# EAGLE board puzzlebot_board (EAGLE 9.5.2)
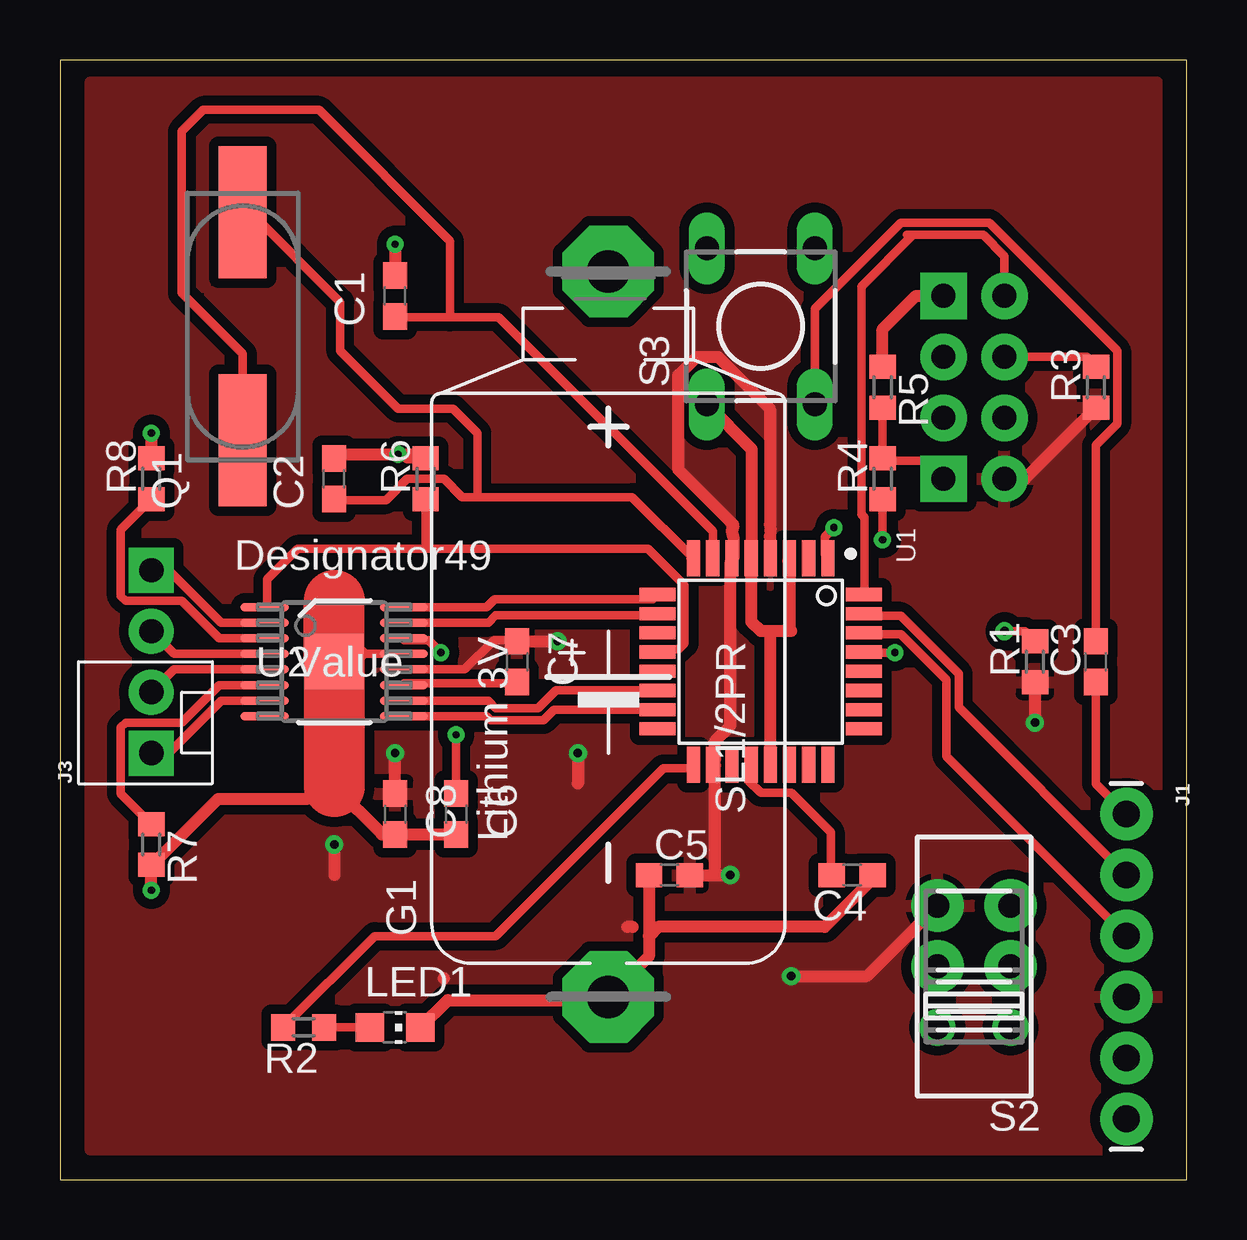
[diagram p0: board, top side]
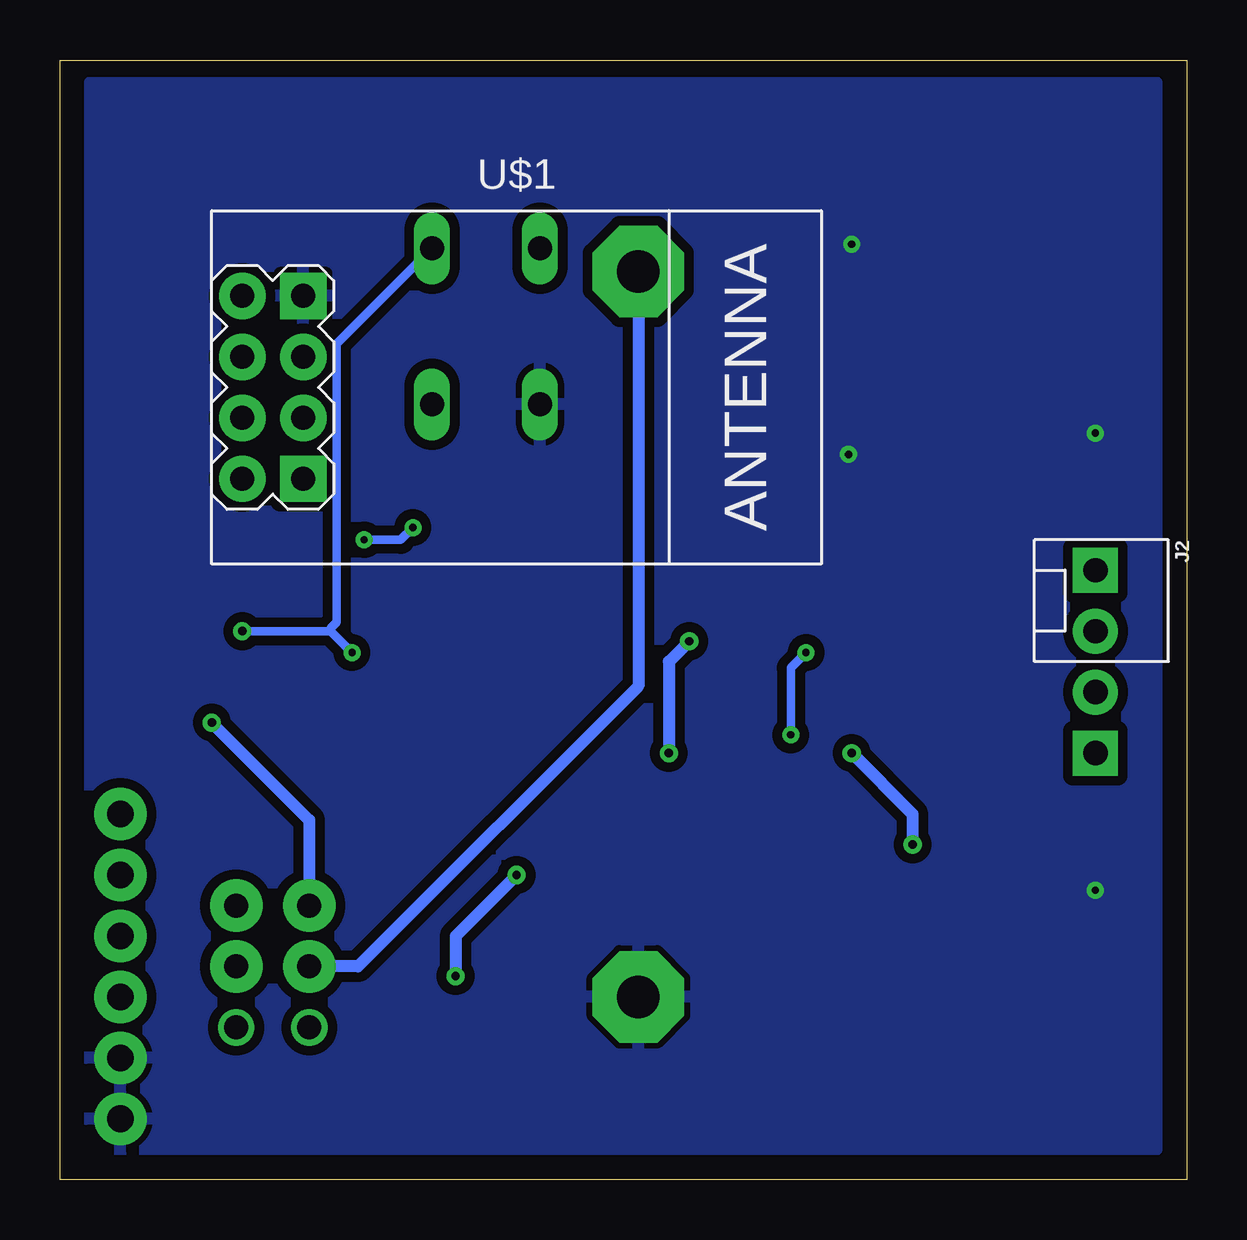
[diagram p1: board, bottom side, seen from below]

Size 46.97 x 46.66 mm. Coordinates in mm from the lower left corner, seen from the top.
Outline: 0,0 46.97,0 46.97,46.66 0,46.66 0,0
Copper layers (1*16): Top 0.035mm / dielectric 1.5mm / Bottom 0.035mm
Design rules "default *": minimum track width 12mil, minimum drill 0.3mm, track to track 6mil, track to pad 6mil, pad to pad 6mil, via to via 6mil, smd to smd 6mil, copper to edge 20mil, drill to drill 6mil, minimum pad ring 10mil, minimum via ring 8mil, stop-mask expansion 4mil, vias tented up to drill 0mil, thermal gap 10mil
Net classes: 0 default: width 0.356 mm; 1 GND: width 0.508 mm, clearance 0.076 mm to class 0

## Footprints (pad centres in the part's own frame; a part is rotated, then mirrored left to right if it is on the bottom)
C0603 = smd 1.1 x 1: 1 -0.85,0; 2 0.85,0
SL-150-1/2AA/PR = drill 1.778 pad 3.81 octagon: + 14.986,0; - -15.24,0
1X06_LONGPADS = drill 1.118 pad 2.184: 1 0,0; 2 2.54,0; 3 5.08,0; 4 7.62,0; 5 10.16,0; 6 12.7,0
MOLEX-1X2 = drill 1.016 pad 1.88 square: 1 0,0 | drill 1.016 pad 1.88: 2 2.54,0
CHIP-LED0805 = smd 1.2 x 1.2: A 0,-1.05; C 0,1.05
CSM-7X-DU = smd 5.5 x 2: 1 -4.75,0; 2 4.75,0
R0603 = smd 1 x 1.1: 1 -0.85,0; 2 0.85,0
2P2T = drill 1 pad 1.422: 1.1 -2.54,1.524; 1.2 -2.54,-1.524 | drill 1 pad 2.184: 2.1 0,1.524; 2.2 0,-1.524; 3.1 2.54,1.524; 3.2 2.54,-1.524
DTS-6 = drill 1 long: 1 -3.25,2.25; 2 3.25,2.25; 3 -3.25,-2.25; 4 3.25,-2.25
QFP80P900X900X120-32N = smd 1.5 x 0.55: 1 -4.3,2.8; 2 -4.3,2; 3 -4.3,1.2; 4 -4.3,0.4; 5 -4.3,-0.4; 6 -4.3,-1.2; 7 -4.3,-2; 8 -4.3,-2.8; 17 4.3,-2.8; 18 4.3,-2; 19 4.3,-1.2; 20 4.3,-0.4; 21 4.3,0.4; 22 4.3,1.2; 23 4.3,2; 24 4.3,2.8 | smd 0.55 x 1.5: 9 -2.8,-4.3; 10 -2,-4.3; 11 -1.2,-4.3; 12 -0.4,-4.3; 13 0.4,-4.3; 14 1.2,-4.3; 15 2,-4.3; 16 2.8,-4.3; 25 2.8,4.3; 26 2,4.3; 27 1.2,4.3; 28 0.4,4.3; 29 -0.4,4.3; 30 -1.2,4.3; 31 -2,4.3; 32 -2.8,4.3
PWP0016K_M = smd 2 x 0.35: 1 -2.9,2.275; 2 -2.9,1.625; 3 -2.9,0.975; 4 -2.9,0.325; 5 -2.9,-0.325; 6 -2.9,-0.975; 7 -2.9,-1.625; 8 -2.9,-2.275; 9 2.9,-2.275; 10 2.9,-1.625; 11 2.9,-0.975; 12 2.9,-0.325; 13 2.9,0.325; 14 2.9,0.975; 15 2.9,1.625; 16 2.9,2.275 | smd 2.46 x 2.31: 17 0,0 | smd 0.5 x 0.5: V 0,0.7
WIRELESS-WIFI-ESP-01 = drill 1 pad 1.93 square: A1 -8.89,3.81; D1 -8.89,-3.81 | drill 1 pad 1.93: A2 -11.43,3.81; B1 -8.89,1.27; B2 -11.43,1.27; C1 -8.89,-1.27; C2 -11.43,-1.27; D2 -11.43,-3.81

## Placement (x,y rotation side)
C1  22pF  [C0603]  13.97,36.83 90 top
C2  22pF  [C0603]  11.43,29.21 90 top
C3  0.1uF  [C0603]  43.18,21.59 90 top
C4  0.1uF  [C0603]  33.02,12.7 180 top
C5  0.1uF  [C0603]  25.4,12.7 0 top
C6  2.2uF  [C0603]  16.51,15.24 270 top
C7  0.01uF  [C0603]  19.05,21.59 270 top
C8  1uF  [C0603]  13.97,15.24 270 top
G1  CR2-KEYSTONE  [SL-150-1/2AA/PR]  22.86,22.86 90 top
J1  [1X06_LONGPADS]  44.45,15.24 270 top
J2  [MOLEX-1X2]  3.81,25.4 270 bottom
J3  [MOLEX-1X2]  3.81,17.78 90 top
LED1  [CHIP-LED0805]  13.97,6.35 270 top
Q1  8M  [CSM-7X-DU]  7.62,35.56 90 top
R1  10K  [R0603]  40.64,21.59 90 top
R2  330  [R0603]  10.16,6.35 180 top
R3  10K  [R0603]  43.18,33.02 90 top
R4  1K  [R0603]  34.29,29.21 90 top
R5  2K  [R0603]  34.29,33.02 270 top
R6  10K  [R0603]  15.24,29.21 90 top
R7  2  [R0603]  3.81,13.97 270 top
R8  2  [R0603]  3.81,29.21 90 top
S2  2P2T  [2P2T]  38.1,8.89 90 top
S3  DTS-6  [DTS-6]  29.21,35.56 90 top
U1  ATMEGA328P-AU  [QFP80P900X900X120-32N]  29.21,21.59 270 top
U2  Value  [PWP0016K_M]  11.43,21.59 0 top
U$1  WIRELESS-WIFI-ESP-01  [WIRELESS-WIFI-ESP-01]  27.94,33.02 0 bottom

## Library data of the parts
C1-C8 = rcl; SPICEPREFIX: C
G1 = battery
J1 = SparkFun-Connectors
J2 J3 = SparkFun-Connectors; SF_ID: PRT-09918
LED1 = led
Q1 = crystal; OC_FARNELL: unknown; OC_NEWARK: unknown
R1-R8 = rcl; SPICEPREFIX: R
S2 = switch
S3 = switch-tact
U1 = ATMEGA328P-AU; AVAILABILITY: Unavailable; DESCRIPTION: Microcontroller Mcu, 8 Bit, Atmega, 20mhz, Tqfp-32; MF: Microchip; MP: ATMEGA328P-AU; PACKAGE: TQFP-32 Microchip; PRICE: None
U2 = drv8833; MANUFACTURER: Texas Instruments; PARTNUMBER: DRV8833CPWPR; REFDES: RefDes; TYPE: TYPE
U$1 = diy-modules

## Nets
DTR: C3.1 J1.1
GND [GND]: C1.2 C2.2 C4.1 C5.1 C6.2 C8.2 G1.- J1.5 J1.6 LED1.C R5.1 R6.2 R7.2 R8.2 S3.1 U1.3 U1.5 U1.21 U2.13 U2.17 U$1.A1
N$1: C2.1 Q1.2 U1.8
N$2: C1.1 Q1.1 U1.7
N$3: C3.2 S3.3
N$4: R1.2 S3.4 U1.29
N$5: R3.2 U$1.B2
N$6: R2.2 U1.17
N$7: LED1.A R2.1
N$8: C4.2 U1.20
N$9: U1.32 U$1.A2
N$10: R4.1 U1.1
N$11: R4.2 R5.2 U$1.D1
N$12: C6.1 U2.14
N$13: C7.2 U2.11
N$14 [GND]: G1.+ S2.2.1
N$16: R7.1 U2.6
N$17: R8.1 U2.3
N$19: J2.1 U2.2
N$20: J3.1 U2.7
N$21: J2.2 U2.4
N$22: J3.2 U2.5
PWM1: U1.14 U2.10
PWM2: U1.15 U2.9
PWM3: U1.9 U2.16
PWM4: U1.10 U2.15
RXI: J1.3 U1.30
SLEEP: R6.1 U1.12 U2.1
TXO: J1.2 U1.31
VCC [GND]: C5.2 C7.1 C8.1 J1.4 R1.1 R3.1 S2.3.1 U1.4 U1.6 U1.18 U2.12 U$1.D2

## Tracks (layer width: path | path; a pad name or v marks a point on that pad's centre or on a via)
DTR
  Top 0.356: 44.45,16 J1.1 43.18,16.51 C3.1
GND  (via drill 0.3)
  Top 0.356: U2.13 12.57,21.91 11.76,21.91
  Top 0.508: 28.83,25.78 U1.5 | 30.35,25.78 U1.3 30.41,22.93 30.48,22.86 29.59,22.86 | 29.59,17.4 U1.21 29.59,17.65 29.59,22.86 | 14.48,30.1 15.24,30.1 | 15.24,30.1 R6.2 | C2.2 11.43,30.23 v14.1,30.23 15.11,30.23 15.24,30.1 | v3.81,12.06 R7.2 3.94,13.21 6.6,15.88 10.29,15.88 11.43,16.38 13.42,14.39 C8.2 C6.2 | v3.81,31.11 R8.2 | 24.55,12.57 C5.1 24.55,10.16 | C4.1 33.78,12.7 33.78,12.45 31.88,10.54 24.93,10.54 24.55,10.16 | R5.1 34.29,35.43 35.69,36.83 U$1.A1 | v13.97,38.99 C1.2 | 11.87,21.8 11.7,21.63 11.47,21.63 U2.17 12.57,21.97 12.57,21.91 | 24.55,10.16 24.55,9.31 G1.- 22.73,7.49 16.16,7.49 LED1.C | U1.5 28.81,23.26 29.21,22.86 29.59,22.86 | U1.5 28.83,26.04 28.83,30.44 S3.1
  Top 2.54: 11.43,16.38 U2.17 11.43,24.13
  pour Bottom (isolate 0.406): 1.27,45.72 1.27,1.27 45.72,1.27 45.72,45.72
N$1
  Top 0.356: 17.4,28.45 16.76,28.45 16,29.21 14.48,29.21 13.59,28.32 11.43,28.32 C2.1 | 17.4,28.45 23.85,28.45 U1.8 26.29,25.91 | 7.87,40.26 7.62,40.26 Q1.2 8,40.26 11.68,36.58 11.68,34.54 14.1,32.13 16.38,32.13 17.4,31.11 17.4,28.45
N$2
  Top 0.356: 16.26,35.94 18.29,35.94 27.21,27.02 U1.7 | 16.26,35.94 13.97,35.94 C1.1 | Q1.1 7.62,34.42 5.08,36.96 5.08,43.69 5.97,44.58 10.79,44.58 16.26,39.12 16.26,35.94
N$3
  Top 0.356: C3.2 43.18,30.61 44.07,31.5 44.07,34.54 38.73,39.88 35.05,39.88 31.46,36.29 S3.3
N$4  (via drill 0.3, 0.35)
  Top 0.356: v34.8,21.97 33.53,21.97 U1.29 | 40.64,22.48 R1.2 40.22,22.86 v39.37,22.86
  Bottom 0.356: v34.8,21.97 35.31,22.48 | 34.8,22.1 v34.8,21.97 | v39.37,22.86 35.69,22.86 | 35.69,22.86 v34.8,21.97 | 31.5,38.73 S3.4 35.43,34.84 35.43,23.24 35.69,22.99 35.69,22.86
N$5
  Top 0.356: R3.2 43.18,33.91 42.8,34.29 U$1.B2
N$6
  Top 0.356: 9.4,6.73 9.4,6.35 R2.2 13.12,10.16 18.16,10.16 25.15,17.14 26.29,17.14 U1.17 26.42,17.27 26.42,17.14
N$7
  Top 0.356: LED1.A R2.1
N$8
  Top 0.356: C4.2 32.13,12.7 32.13,14.48 30.48,16.13 29.21,16.13 28.7,16.64 28.7,17.27 U1.20
N$9
  Top 0.356: 35.31,39.37 35.56,39.37 | 35.56,39.37 38.48,39.37 39.37,38.48 U$1.A2 | U1.32 33.53,24.51 33.53,27.61 33.41,27.72 33.41,37.22 35.56,39.37
N$10  (via drill 0.3)
  Top 0.356: v32.26,27.18 31.88,26.8 31.88,26.04 32,25.91 U1.1 | R4.1 v34.29,26.67
  Bottom 0.356: v34.29,26.67 32.77,26.67 v32.26,27.18
N$11
  Top 0.356: R5.2 R4.2 34.42,29.97 36.07,29.97 U$1.D1
N$12  (via drill 0.3)
  Top 0.356: 16.51,16.26 C6.1 v16.51,18.54 | v15.88,21.97 15.37,22.48 14.35,22.48 U2.14
  Bottom 0.356: v16.51,18.54 16.51,21.34 v15.88,21.97
N$13
  Top 0.356: C7.2 19.05,20.7 14.35,20.7 U2.11
N$14
  Bottom 0.508: S2.2.1 34.54,8.89 22.86,20.57 G1.+
N$16
  Top 0.356: U2.6 6.64,20.61 5.08,19.05 2.73,19.05 2.54,18.86 2.54,16.09 R7.1
N$17
  Top 0.356: U2.3 6.64,22.57 5.08,24.13 2.73,24.13 2.54,24.32 2.54,27.09 R8.1
N$19
  Top 0.356: U2.2 6.71,23.21 4.53,25.4 J2.1
N$20
  Top 0.356: U2.7 6.71,19.96 4.53,17.78 J3.1
N$21
  Top 0.356: U2.4 4.75,21.91 J2.2
N$22
  Top 0.356: J3.2 4.75,21.27 U2.5
PWM1
  Top 0.356: U1.14 20.67,20.39 19.94,19.66 18.16,19.66 17.86,19.96 U2.10
PWM2
  Top 0.356: U2.9 17.79,19.32 17.95,19.15 20.15,19.15 20.59,19.59 U1.15
PWM3
  Top 0.356: U2.16 17.79,23.86 18.12,24.2 24.71,24.2 U1.9
PWM4
  Top 0.356: U2.15 17.86,23.21 18.16,23.52 24.84,23.52 U1.10
RXI
  Top 0.356: U1.30 33.53,22.73 35.05,22.73 36.96,20.83 36.96,17.65 J1.3
SLEEP
  Top 0.356: U2.1 8.64,23.88 8.64,25.02 9.91,26.29 15.24,26.29 | U1.12 25.02,22.1 25.78,22.1 26.04,22.35 26.04,24.77 24.51,26.29 15.24,26.29 | R6.1 15.24,26.29
TXO
  Top 0.356: U1.31 33.53,23.5 35.05,23.5 37.47,21.08 37.47,19.68 J1.2
VCC  (via drill 0.35)
  Top 0.356: U2.12 16.87,21.27 18.08,22.48 19.05,22.48
  Top 0.508: U1.4 29.59,25.91 29.59,26.8 29.61,27.05 29.59,27.3 29.59,32.13 27.43,34.29 26.54,34.29 25.78,33.53 25.78,29.59 28.07,27.3 28.01,27.05 28.07,26.8 28.07,25.91 U1.6 27.94,25.65 27.94,18.92 27.3,18.29 27.3,17.53 U1.18 27.3,17.27 27.3,12.7 | C5.2 27.3,12.7 | 27.3,12.7 v27.94,12.7 | v30.48,8.49 33.63,8.49 S2.3.1 | R3.1 40.22,29.21 U$1.D2 | 19.05,22.48 C7.1 | 16,8.41 16,8.38 | 23.88,10.54 23.64,10.54 | C7.1 19.47,22.44 | v21.59,17.78 21.59,16.51 | C7.1 v20.74,22.44 | v11.43,13.97 11.43,12.7 | C8.1 v13.97,17.78 | R1.1 v40.64,19.05
  Bottom 0.508: v27.94,12.7 30.48,10.16 v30.48,8.49 | v20.74,22.44 21.59,21.59 v21.59,17.78 | v13.97,17.78 11.43,15.24 v11.43,13.97 | v40.64,19.05 36.58,14.99 S2.3.1
  pour Top (isolate 0.406): 1.27,45.72 1.27,1.27 45.72,1.27 45.72,45.72